# EAGLE board ProtoCard (EAGLE 9.6.1)
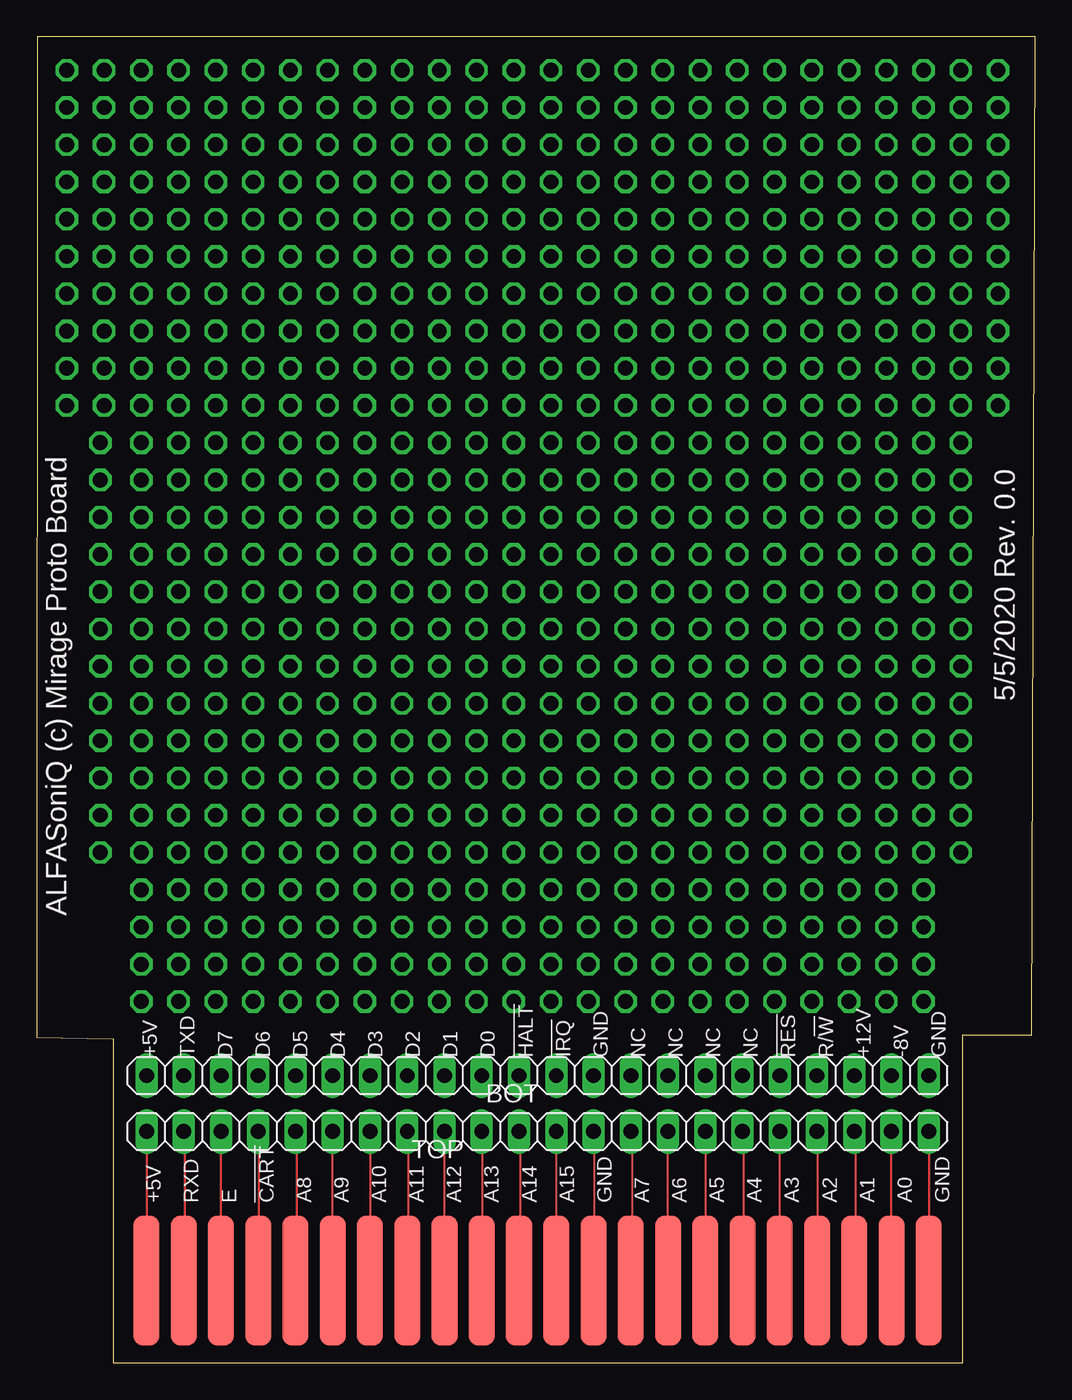
[diagram p0: board, top side]
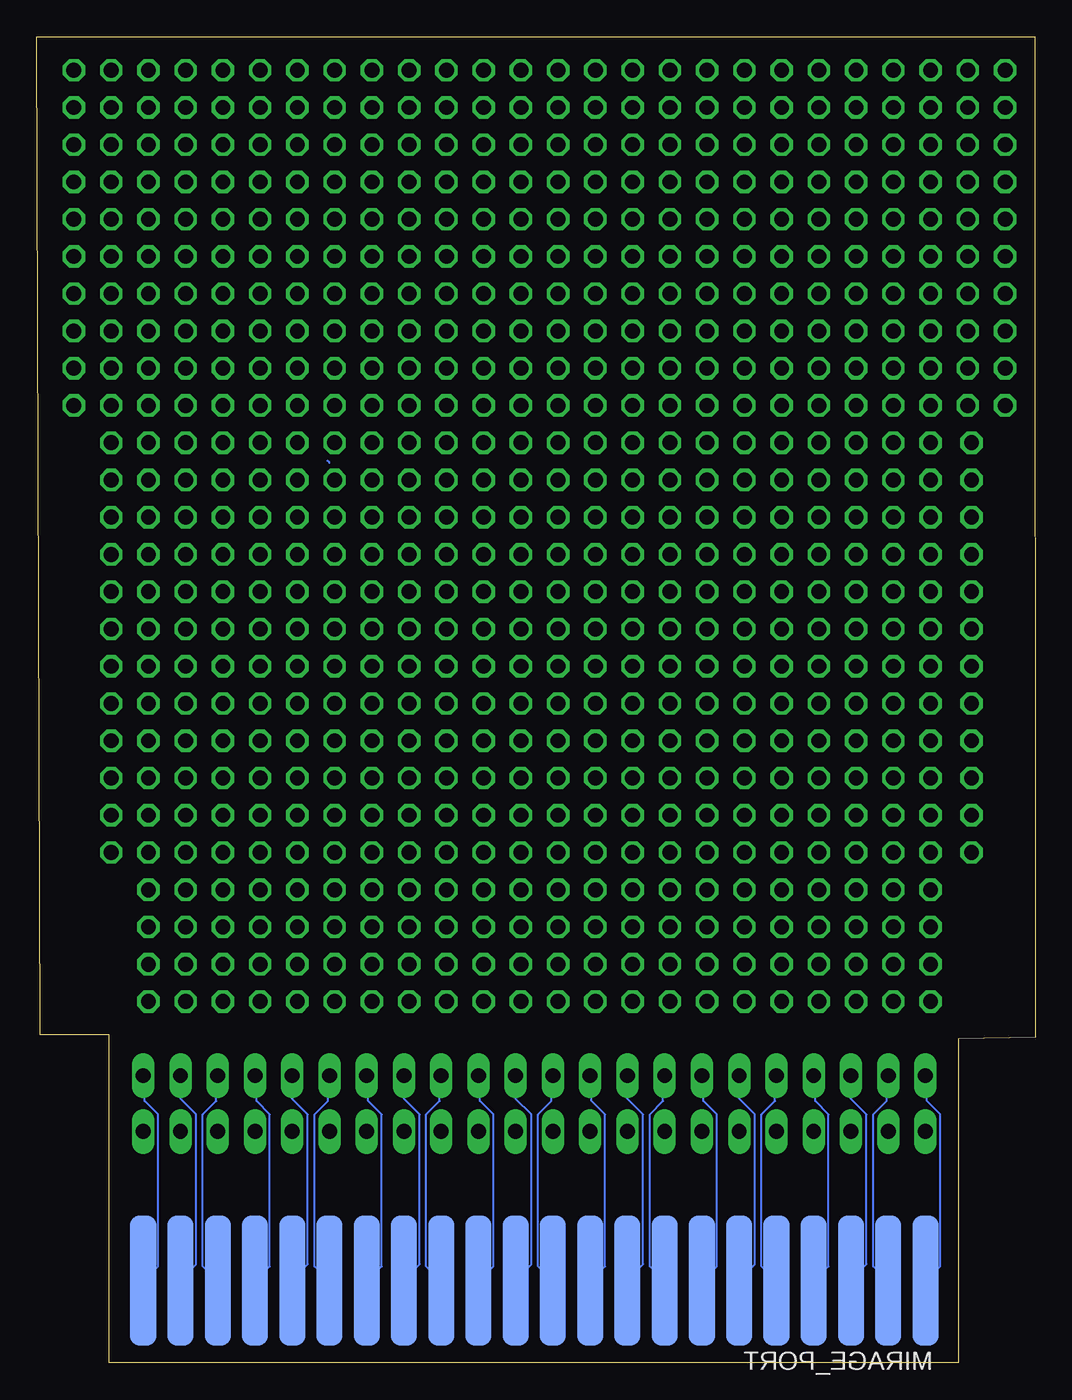
[diagram p1: board, bottom side, seen from below]

Size 68.1 x 90.42 mm. Coordinates in mm from the lower left corner, seen from the top.
Outline: 0.03,90.42 0,22.17 5.23,22.1 5.23,0 63.14,0 63.14,22.35 67.84,22.35 68.1,90.42 0.03,90.42
Copper layers (1*16): Top 0.035mm / dielectric 1.5mm / Bottom 0.035mm
Design rules "default": minimum track width 6mil, minimum drill 0.35mm, track to track 6mil, track to pad 6mil, pad to pad 6mil, via to via 6mil, smd to smd 6mil, copper to edge 40mil, drill to drill 6mil, minimum pad ring 10mil, minimum via ring 8mil, stop-mask expansion 4mil, vias tented up to drill 0mil, thermal gap 10mil

## Footprints (pad centres in the part's own frame; a part is rotated, then mirrored left to right if it is on the bottom)
1X22 = drill 1.016 long: 1 -26.67,0; 2 -24.13,0; 3 -21.59,0; 4 -19.05,0; 5 -16.51,0; 6 -13.97,0; 7 -11.43,0; 8 -8.89,0; 9 -6.35,0; 10 -3.81,0; 11 -1.27,0; 12 1.27,0; 13 3.81,0; 14 6.35,0; 15 8.89,0; 16 11.43,0; 17 13.97,0; 18 16.51,0; 19 19.05,0; 20 21.59,0; 21 24.13,0; 22 26.67,0
CARTRIDGE_EXPANSION-PORT = smd 1.778 x 8.89 bottom: 11 38.1,0; 13 35.56,0; 15 33.02,0; 17 30.48,0; !HALT 22.86,0; !IRQ 25.4,0; !RES 40.64,0; +5V_43 -2.54,0; +12 45.72,0; -8V 48.26,0; D0 20.32,0; D1 17.78,0; D2 15.24,0; D3 12.7,0; D4 10.16,0; D5 7.62,0; D6 5.08,0; D7 2.54,0; GND_1 50.8,0; GND_19 27.94,0; R/!W 43.18,0; TXD 0,0 | smd 1.778 x 8.89: !CART 5.08,0; +5V -2.54,0; A0 48.26,0; A1 45.72,0; A2 43.18,0; A3 40.64,0; A4 38.1,0; A5 35.56,0; A6 33.02,0; A7 30.48,0; A8 7.62,0; A9 10.16,0; A10 12.7,0; A11 15.24,0; A12 17.78,0; A13 20.32,0; A14 22.86,0; A15 25.4,0; E 2.54,0; GND 27.94,0; GND_2 50.8,0; RXD 0,0

## Placement (x,y rotation side)
BOT  BOT  [1X22]  34.16,19.58 180 top
MIRAGE_PORT  CARTRIDGE_EXPANSION-PORT  [CARTRIDGE_EXPANSION-PORT]  10.03,5.61 0 top
TOP  TOP  [1X22]  34.16,15.77 180 top

## Library data of the parts
BOT TOP = pinhead
MIRAGE_PORT = cart-proto

## Nets
!CART: MIRAGE_PORT.!CART TOP.19
!HALT: BOT.12 MIRAGE_PORT.!HALT
!IRQ: BOT.11 MIRAGE_PORT.!IRQ
!RES: BOT.5 MIRAGE_PORT.!RES
+5V_43: BOT.22 MIRAGE_PORT.+5V_43
+5V_44: MIRAGE_PORT.+5V TOP.22
+12: BOT.3 MIRAGE_PORT.+12
-8V: BOT.2 MIRAGE_PORT.-8V
A0: MIRAGE_PORT.A0 TOP.2
A1: MIRAGE_PORT.A1 TOP.3
A2: MIRAGE_PORT.A2 TOP.4
A3: MIRAGE_PORT.A3 TOP.5
A4: MIRAGE_PORT.A4 TOP.6
A5: MIRAGE_PORT.A5 TOP.7
A6: MIRAGE_PORT.A6 TOP.8
A7: MIRAGE_PORT.A7 TOP.9
A8: MIRAGE_PORT.A8 TOP.18
A9: MIRAGE_PORT.A9 TOP.17
A10: MIRAGE_PORT.A10 TOP.16
A11: MIRAGE_PORT.A11 TOP.15
A12: MIRAGE_PORT.A12 TOP.14
A13: MIRAGE_PORT.A13 TOP.13
A14: MIRAGE_PORT.A14 TOP.12
A15: MIRAGE_PORT.A15 TOP.11
D0: BOT.13 MIRAGE_PORT.D0
D1: BOT.14 MIRAGE_PORT.D1
D2: BOT.15 MIRAGE_PORT.D2
D3: BOT.16 MIRAGE_PORT.D3
D4: BOT.17 MIRAGE_PORT.D4
D5: BOT.18 MIRAGE_PORT.D5
D6: BOT.19 MIRAGE_PORT.D6
D7: BOT.20 MIRAGE_PORT.D7
E: MIRAGE_PORT.E TOP.20
GND: MIRAGE_PORT.GND TOP.10
GND_1: BOT.1 MIRAGE_PORT.GND_1
GND_2: MIRAGE_PORT.GND_2 TOP.1
GND_19: BOT.10 MIRAGE_PORT.GND_19
N$6: BOT.6 MIRAGE_PORT.11
N$7: BOT.7 MIRAGE_PORT.13
N$8: BOT.8 MIRAGE_PORT.15
N$9: BOT.9 MIRAGE_PORT.17
R/!W: BOT.4 MIRAGE_PORT.R/!W
RXD: MIRAGE_PORT.RXD TOP.21
TXD: BOT.21 MIRAGE_PORT.TXD

## Tracks (layer width: path | path; a pad name or v marks a point on that pad's centre or on a via)
5V  (via drill 1.02)
  other vias: 7.14,24.64
!CART
  Top 0.152: TOP.19 15.16,15.72 15.16,5.66 MIRAGE_PORT.!CART
!HALT
  Bottom 0.152: BOT.12 33,19.53 33,17.86 33.91,16.94 33.91,6.58 33,5.66 MIRAGE_PORT.!HALT
!IRQ
  Bottom 0.152: BOT.11 35.43,18.01 34.37,16.94 34.37,6.73 35.43,5.66 MIRAGE_PORT.!IRQ
!RES
  Bottom 0.152: BOT.5 50.67,18.01 49.61,16.94 49.61,6.73 50.67,5.66 MIRAGE_PORT.!RES
+5V
  Bottom 0.152: 48.13,61.37 48.29,61.52
+5V_43
  Bottom 0.152: BOT.22 7.39,19.53 7.39,17.86 6.48,16.94 6.48,6.58 7.39,5.66 MIRAGE_PORT.+5V_43
+5V_44
  Top 0.152: TOP.22 7.54,15.72 7.54,5.66 MIRAGE_PORT.+5V
+12
  Bottom 0.152: BOT.3 55.86,19.53 55.86,17.86 56.77,16.94 56.77,6.58 55.86,5.66 MIRAGE_PORT.+12
-8V
  Bottom 0.152: BOT.2 58.29,18.01 57.23,16.94 57.23,6.73 58.29,5.66 MIRAGE_PORT.-8V
A0
  Top 0.152: MIRAGE_PORT.A0 TOP.2
A1
  Top 0.152: TOP.3 55.86,15.72 55.86,5.66 MIRAGE_PORT.A1
A2
  Top 0.152: TOP.4 53.26,15.72 53.26,5.66 MIRAGE_PORT.A2
A3
  Top 0.152: MIRAGE_PORT.A3 TOP.5
A4
  Top 0.152: TOP.6 48.23,15.72 48.23,5.66 MIRAGE_PORT.A4
A5
  Top 0.152: TOP.7 45.64,15.72 45.64,5.66 MIRAGE_PORT.A5
A6
  Top 0.152: MIRAGE_PORT.A6 TOP.8
A7
  Top 0.152: TOP.9 40.62,15.72 40.62,5.66 MIRAGE_PORT.A7
A8
  Top 0.152: TOP.18 17.75,15.72 17.75,5.66 MIRAGE_PORT.A8
A9
  Top 0.152: MIRAGE_PORT.A9 TOP.17
A10
  Top 0.152: TOP.16 22.78,15.72 22.78,5.66 MIRAGE_PORT.A10
A11
  Top 0.152: TOP.15 25.38,15.72 25.38,5.66 MIRAGE_PORT.A11
A12
  Top 0.152: MIRAGE_PORT.A12 TOP.14
A13
  Top 0.152: TOP.13 30.4,15.72 30.4,5.66 MIRAGE_PORT.A13
A14
  Top 0.152: TOP.12 33,15.72 33,5.66 MIRAGE_PORT.A14
A15
  Top 0.152: MIRAGE_PORT.A15 TOP.11
D0
  Bottom 0.152: BOT.13 30.25,19.53 30.25,17.86 29.34,16.94 29.34,6.58 30.25,5.66 MIRAGE_PORT.D0
D1
  Bottom 0.152: BOT.14 27.81,18.01 26.75,16.94 26.75,6.73 27.81,5.66 MIRAGE_PORT.D1
D2
  Bottom 0.152: BOT.15 25.38,19.53 25.38,17.86 26.29,16.94 26.29,6.58 25.38,5.66 MIRAGE_PORT.D2
D3
  Bottom 0.152: BOT.16 22.63,19.53 22.63,17.86 21.72,16.94 21.72,6.58 22.63,5.66 MIRAGE_PORT.D3
D4
  Bottom 0.152: BOT.17 20.19,18.01 19.13,16.94 19.13,6.73 20.19,5.66 MIRAGE_PORT.D4
D5
  Bottom 0.152: BOT.18 17.75,19.53 17.75,17.86 18.67,16.94 18.67,6.58 17.75,5.66 MIRAGE_PORT.D5
D6
  Bottom 0.152: BOT.19 15.01,19.53 15.01,17.86 14.1,16.94 14.1,6.58 15.01,5.66 MIRAGE_PORT.D6
D7
  Bottom 0.152: BOT.20 12.57,18.01 11.51,16.94 11.51,6.73 12.57,5.66 MIRAGE_PORT.D7
E
  Top 0.152: MIRAGE_PORT.E TOP.20
GND
  Top 0.152: TOP.10 38.02,15.72 38.02,5.66 MIRAGE_PORT.GND
GND1  (via drill 1.02)
  other vias: 60.48,24.64
GND_1
  Bottom 0.152: BOT.1 60.73,19.53 60.73,17.86 59.82,16.94 59.82,6.58 60.73,5.66 MIRAGE_PORT.GND_1
GND_2
  Top 0.152: TOP.1 60.88,15.72 60.88,5.66 MIRAGE_PORT.GND_2
GND_19
  Bottom 0.152: BOT.10 37.87,19.53 37.87,17.86 36.96,16.94 36.96,6.58 37.87,5.66 MIRAGE_PORT.GND_19
N$1  (via drill 1.02)
  other vias: 47.78,27.18
N$2  (via drill 1.02)
  other vias: 9.68,32.26
N$3  (via drill 1.02)
  other vias: 9.68,34.8
N$4  (via drill 1.02)
  other vias: 9.68,37.34
N$5  (via drill 1.02)
  other vias: 9.68,39.88
N$6
  Bottom 0.152: BOT.6 48.23,19.53 48.23,17.86 49.15,16.94 49.15,6.58 48.23,5.66 MIRAGE_PORT.11
N$7
  Bottom 0.152: BOT.7 45.49,19.53 45.49,17.86 44.58,16.94 44.58,6.58 45.49,5.66 MIRAGE_PORT.13
N$8
  Bottom 0.152: BOT.8 43.05,18.01 41.99,16.94 41.99,6.73 43.05,5.66 MIRAGE_PORT.15
N$9
  Bottom 0.152: BOT.9 40.62,19.53 40.62,17.86 41.53,16.94 41.53,6.58 40.62,5.66 MIRAGE_PORT.17
N$10  (via drill 1.02)
  other vias: 9.68,42.42
N$11  (via drill 1.02)
  other vias: 9.68,44.96
N$12  (via drill 1.02)
  other vias: 9.68,47.5
N$13  (via drill 1.02)
  other vias: 9.68,50.04
N$14  (via drill 1.02)
  other vias: 9.68,52.58
N$15  (via drill 1.02)
  other vias: 9.68,55.12
N$16  (via drill 1.02)
  other vias: 9.68,57.66
N$17  (via drill 1.02)
  other vias: 9.68,60.2
N$18  (via drill 1.02)
  other vias: 9.68,62.74
N$19  (via drill 1.02)
  other vias: 9.68,65.28
N$20  (via drill 1.02)
  other vias: 9.68,67.82
N$21  (via drill 1.02)
  other vias: 32.54,47.5
N$22  (via drill 1.02)
  other vias: 30,47.5
N$23  (via drill 1.02)
  other vias: 55.4,24.64
N$24  (via drill 1.02)
  other vias: 32.54,44.96
N$25  (via drill 1.02)
  other vias: 57.94,27.18
N$26  (via drill 1.02)
  other vias: 52.86,24.64
N$27  (via drill 1.02)
  other vias: 57.94,29.72
N$28  (via drill 1.02)
  other vias: 55.4,27.18
N$29  (via drill 1.02)
  other vias: 50.32,24.64
N$30  (via drill 1.02)
  other vias: 55.4,29.72
N$31  (via drill 1.02)
  other vias: 52.86,27.18
N$32  (via drill 1.02)
  other vias: 52.86,29.72
N$33  (via drill 1.02)
  other vias: 50.32,27.18
N$34  (via drill 1.02)
  other vias: 50.32,29.72
N$35  (via drill 1.02)
  other vias: 47.78,29.72
N$36  (via drill 1.02)
  other vias: 47.78,24.64
N$37  (via drill 1.02)
  other vias: 45.24,27.18
N$38  (via drill 1.02)
  other vias: 45.24,29.72
N$39  (via drill 1.02)
  other vias: 45.24,24.64
N$40  (via drill 1.02)
  other vias: 42.7,27.18
N$41  (via drill 1.02)
  other vias: 42.7,29.72
N$42  (via drill 1.02)
  other vias: 42.7,24.64
N$43  (via drill 1.02)
  other vias: 40.16,27.18
N$44  (via drill 1.02)
  other vias: 40.16,29.72
N$45  (via drill 1.02)
  other vias: 40.16,24.64
N$46  (via drill 1.02)
  other vias: 37.62,27.18
N$47  (via drill 1.02)
  other vias: 37.62,29.72
N$48  (via drill 1.02)
  other vias: 37.62,24.64
N$49  (via drill 1.02)
  other vias: 35.08,27.18
N$50  (via drill 1.02)
  other vias: 35.08,29.72
N$51  (via drill 1.02)
  other vias: 35.08,24.64
N$52  (via drill 1.02)
  other vias: 32.54,27.18
N$53  (via drill 1.02)
  other vias: 32.54,29.72
N$54  (via drill 1.02)
  other vias: 32.54,24.64
N$55  (via drill 1.02)
  other vias: 30,27.18
N$56  (via drill 1.02)
  other vias: 30,29.72
N$57  (via drill 1.02)
  other vias: 30,24.64
N$58  (via drill 1.02)
  other vias: 27.46,27.18
N$59  (via drill 1.02)
  other vias: 27.46,29.72
N$60  (via drill 1.02)
  other vias: 27.46,24.64
N$61  (via drill 1.02)
  other vias: 24.92,27.18
N$62  (via drill 1.02)
  other vias: 24.92,29.72
N$63  (via drill 1.02)
  other vias: 24.92,24.64
N$64  (via drill 1.02)
  other vias: 22.38,27.18
N$65  (via drill 1.02)
  other vias: 22.38,29.72
N$66  (via drill 1.02)
  other vias: 22.38,24.64
N$67  (via drill 1.02)
  other vias: 19.84,27.18
N$68  (via drill 1.02)
  other vias: 19.84,29.72
N$69  (via drill 1.02)
  other vias: 19.84,24.64
N$70  (via drill 1.02)
  other vias: 17.3,27.18
N$71  (via drill 1.02)
  other vias: 17.3,29.72
N$72  (via drill 1.02)
  other vias: 17.3,24.64
N$73  (via drill 1.02)
  other vias: 14.76,27.18
N$74  (via drill 1.02)
  other vias: 14.76,29.72
N$75  (via drill 1.02)
  other vias: 14.76,24.64
N$76  (via drill 1.02)
  other vias: 12.22,27.18
N$77  (via drill 1.02)
  other vias: 12.22,29.72
N$78  (via drill 1.02)
  other vias: 12.22,24.64
N$79  (via drill 1.02)
  other vias: 9.68,27.18
N$80  (via drill 1.02)
  other vias: 9.68,29.72
N$81  (via drill 1.02)
  other vias: 9.68,24.64
N$82  (via drill 1.02)
  other vias: 35.08,47.5
N$83  (via drill 1.02)
  other vias: 9.68,70.36
N$84  (via drill 1.02)
  other vias: 9.68,72.9
N$85  (via drill 1.02)
  other vias: 57.94,32.26
N$86  (via drill 1.02)
  other vias: 55.4,32.26
N$87  (via drill 1.02)
  other vias: 52.86,32.26
N$88  (via drill 1.02)
  other vias: 50.32,32.26
N$89  (via drill 1.02)
  other vias: 47.78,32.26
N$90  (via drill 1.02)
  other vias: 45.24,32.26
N$91  (via drill 1.02)
  other vias: 42.7,32.26
N$92  (via drill 1.02)
  other vias: 40.16,32.26
N$93  (via drill 1.02)
  other vias: 37.62,32.26
N$94  (via drill 1.02)
  other vias: 35.08,32.26
N$95  (via drill 1.02)
  other vias: 32.54,32.26
N$96  (via drill 1.02)
  other vias: 30,32.26
N$97  (via drill 1.02)
  other vias: 27.46,32.26
N$98  (via drill 1.02)
  other vias: 24.92,32.26
N$99  (via drill 1.02)
  other vias: 22.38,32.26
N$100  (via drill 1.02)
  other vias: 19.84,32.26
N$101  (via drill 1.02)
  other vias: 17.3,32.26
N$102  (via drill 1.02)
  other vias: 14.76,32.26
N$103  (via drill 1.02)
  other vias: 12.22,32.26
N$104  (via drill 1.02)
  other vias: 7.14,70.36
N$105  (via drill 1.02)
  other vias: 7.14,67.82
N$106  (via drill 1.02)
  other vias: 57.94,34.8
N$107  (via drill 1.02)
  other vias: 55.4,34.8
N$108  (via drill 1.02)
  other vias: 52.86,34.8
N$109  (via drill 1.02)
  other vias: 50.32,34.8
N$110  (via drill 1.02)
  other vias: 47.78,34.8
N$111  (via drill 1.02)
  other vias: 45.24,34.8
N$112  (via drill 1.02)
  other vias: 42.7,34.8
N$113  (via drill 1.02)
  other vias: 40.16,34.8
N$114  (via drill 1.02)
  other vias: 37.62,34.8
N$115  (via drill 1.02)
  other vias: 35.08,34.8
N$116  (via drill 1.02)
  other vias: 32.54,34.8
N$117  (via drill 1.02)
  other vias: 30,34.8
N$118  (via drill 1.02)
  other vias: 27.46,34.8
N$119  (via drill 1.02)
  other vias: 24.92,34.8
N$120  (via drill 1.02)
  other vias: 22.38,34.8
N$121  (via drill 1.02)
  other vias: 19.84,34.8
N$122  (via drill 1.02)
  other vias: 17.3,34.8
N$123  (via drill 1.02)
  other vias: 14.76,34.8
N$124  (via drill 1.02)
  other vias: 12.22,34.8
N$125  (via drill 1.02)
  other vias: 7.14,65.28
N$126  (via drill 1.02)
  other vias: 7.14,62.74
N$127  (via drill 1.02)
  other vias: 57.94,37.34
N$128  (via drill 1.02)
  other vias: 55.4,37.34
N$129  (via drill 1.02)
  other vias: 52.86,37.34
N$130  (via drill 1.02)
  other vias: 50.32,37.34
N$131  (via drill 1.02)
  other vias: 47.78,37.34
N$132  (via drill 1.02)
  other vias: 45.24,37.34
N$133  (via drill 1.02)
  other vias: 42.7,37.34
N$134  (via drill 1.02)
  other vias: 40.16,37.34
N$135  (via drill 1.02)
  other vias: 37.62,37.34
N$136  (via drill 1.02)
  other vias: 35.08,37.34
N$137  (via drill 1.02)
  other vias: 32.54,37.34
N$138  (via drill 1.02)
  other vias: 30,37.34
N$139  (via drill 1.02)
  other vias: 27.46,37.34
N$140  (via drill 1.02)
  other vias: 24.92,37.34
N$141  (via drill 1.02)
  other vias: 22.38,37.34
N$142  (via drill 1.02)
  other vias: 19.84,37.34
N$143  (via drill 1.02)
  other vias: 17.3,37.34
N$144  (via drill 1.02)
  other vias: 14.76,37.34
N$145  (via drill 1.02)
  other vias: 12.22,37.34
N$146  (via drill 1.02)
  other vias: 7.14,27.18
N$147  (via drill 1.02)
  other vias: 7.14,29.72
N$148  (via drill 1.02)
  other vias: 57.94,39.88
N$149  (via drill 1.02)
  other vias: 55.4,39.88
N$150  (via drill 1.02)
  other vias: 52.86,39.88
N$151  (via drill 1.02)
  other vias: 50.32,39.88
N$152  (via drill 1.02)
  other vias: 47.78,39.88
N$153  (via drill 1.02)
  other vias: 45.24,39.88
N$154  (via drill 1.02)
  other vias: 42.7,39.88
N$155  (via drill 1.02)
  other vias: 40.16,39.88
N$156  (via drill 1.02)
  other vias: 37.62,39.88
N$157  (via drill 1.02)
  other vias: 35.08,39.88
N$158  (via drill 1.02)
  other vias: 32.54,39.88
N$159  (via drill 1.02)
  other vias: 30,39.88
N$160  (via drill 1.02)
  other vias: 27.46,39.88
N$161  (via drill 1.02)
  other vias: 24.92,39.88
N$162  (via drill 1.02)
  other vias: 22.38,39.88
N$163  (via drill 1.02)
  other vias: 19.84,39.88
N$164  (via drill 1.02)
  other vias: 17.3,39.88
N$165  (via drill 1.02)
  other vias: 14.76,39.88
N$166  (via drill 1.02)
  other vias: 12.22,39.88
N$167  (via drill 1.02)
  other vias: 7.14,32.26
N$168  (via drill 1.02)
  other vias: 7.14,34.8
N$169  (via drill 1.02)
  other vias: 57.94,42.42
N$170  (via drill 1.02)
  other vias: 55.4,42.42
N$171  (via drill 1.02)
  other vias: 52.86,42.42
N$172  (via drill 1.02)
  other vias: 50.32,42.42
N$173  (via drill 1.02)
  other vias: 47.78,42.42
N$174  (via drill 1.02)
  other vias: 45.24,42.42
N$175  (via drill 1.02)
  other vias: 42.7,42.42
N$176  (via drill 1.02)
  other vias: 40.16,42.42
N$177  (via drill 1.02)
  other vias: 37.62,42.42
N$178  (via drill 1.02)
  other vias: 30,42.42
N$179  (via drill 1.02)
  other vias: 27.46,42.42
N$180  (via drill 1.02)
  other vias: 24.92,42.42
N$181  (via drill 1.02)
  other vias: 22.38,42.42
N$182  (via drill 1.02)
  other vias: 19.84,42.42
N$183  (via drill 1.02)
  other vias: 17.3,42.42
N$184  (via drill 1.02)
  other vias: 14.76,42.42
N$185  (via drill 1.02)
  other vias: 12.22,42.42
N$186  (via drill 1.02)
  other vias: 7.14,37.34
N$187  (via drill 1.02)
  other vias: 7.14,39.88
N$188  (via drill 1.02)
  other vias: 60.48,44.96
N$189  (via drill 1.02)
  other vias: 55.4,44.96
N$190  (via drill 1.02)
  other vias: 52.86,44.96
N$191  (via drill 1.02)
  other vias: 50.32,44.96
N$192  (via drill 1.02)
  other vias: 47.78,44.96
N$193  (via drill 1.02)
  other vias: 45.24,44.96
N$194  (via drill 1.02)
  other vias: 42.7,44.96
N$195  (via drill 1.02)
  other vias: 40.16,44.96
N$196  (via drill 1.02)
  other vias: 37.62,44.96
N$197  (via drill 1.02)
  other vias: 30,44.96
N$198  (via drill 1.02)
  other vias: 27.46,44.96
N$199  (via drill 1.02)
  other vias: 24.92,44.96
N$200  (via drill 1.02)
  other vias: 22.38,44.96
N$201  (via drill 1.02)
  other vias: 19.84,44.96
N$202  (via drill 1.02)
  other vias: 17.3,44.96
N$203  (via drill 1.02)
  other vias: 14.76,44.96
N$204  (via drill 1.02)
  other vias: 12.22,44.96
N$205  (via drill 1.02)
  other vias: 7.14,42.42
N$206  (via drill 1.02)
  other vias: 7.14,44.96
N$207  (via drill 1.02)
  other vias: 57.94,47.5
N$208  (via drill 1.02)
  other vias: 55.4,47.5
N$209  (via drill 1.02)
  other vias: 52.86,47.5
N$210  (via drill 1.02)
  other vias: 50.32,47.5
N$211  (via drill 1.02)
  other vias: 47.78,47.5
N$212  (via drill 1.02)
  other vias: 45.24,47.5
N$213  (via drill 1.02)
  other vias: 42.7,47.5
N$214  (via drill 1.02)
  other vias: 40.16,47.5
N$215  (via drill 1.02)
  other vias: 37.62,47.5
N$216  (via drill 1.02)
  other vias: 7.14,47.5
N$217  (via drill 1.02)
  other vias: 7.14,50.04
N$218  (via drill 1.02)
  other vias: 35.08,44.96
N$219  (via drill 1.02)
  other vias: 27.46,47.5
N$220  (via drill 1.02)
  other vias: 24.92,47.5
N$221  (via drill 1.02)
  other vias: 22.38,47.5
N$222  (via drill 1.02)
  other vias: 19.84,47.5
N$223  (via drill 1.02)
  other vias: 17.3,47.5
N$224  (via drill 1.02)
  other vias: 14.76,47.5
N$225  (via drill 1.02)
  other vias: 12.22,47.5
N$226  (via drill 1.02)
  other vias: 7.14,52.58
N$227  (via drill 1.02)
  other vias: 7.14,55.12
N$228  (via drill 1.02)
  other vias: 57.94,50.04
N$229  (via drill 1.02)
  other vias: 55.4,50.04
N$230  (via drill 1.02)
  other vias: 52.86,50.04
N$231  (via drill 1.02)
  other vias: 50.32,50.04
N$232  (via drill 1.02)
  other vias: 47.78,50.04
N$233  (via drill 1.02)
  other vias: 45.24,50.04
N$234  (via drill 1.02)
  other vias: 42.7,50.04
N$235  (via drill 1.02)
  other vias: 40.16,50.04
N$236  (via drill 1.02)
  other vias: 37.62,50.04
N$237  (via drill 1.02)
  other vias: 35.08,50.04
N$238  (via drill 1.02)
  other vias: 32.54,50.04
N$239  (via drill 1.02)
  other vias: 30,50.04
N$240  (via drill 1.02)
  other vias: 27.46,50.04
N$241  (via drill 1.02)
  other vias: 24.92,50.04
N$242  (via drill 1.02)
  other vias: 22.38,50.04
N$243  (via drill 1.02)
  other vias: 19.84,50.04
N$244  (via drill 1.02)
  other vias: 17.3,50.04
N$245  (via drill 1.02)
  other vias: 14.76,50.04
N$246  (via drill 1.02)
  other vias: 12.22,50.04
N$247  (via drill 1.02)
  other vias: 7.14,57.66
N$248  (via drill 1.02)
  other vias: 7.14,60.2
N$249  (via drill 1.02)
  other vias: 57.94,52.58
N$250  (via drill 1.02)
  other vias: 55.4,52.58
N$251  (via drill 1.02)
  other vias: 52.86,52.58
N$252  (via drill 1.02)
  other vias: 50.32,52.58
N$253  (via drill 1.02)
  other vias: 47.78,52.58
N$254  (via drill 1.02)
  other vias: 45.24,52.58
N$255  (via drill 1.02)
  other vias: 42.7,52.58
N$256  (via drill 1.02)
  other vias: 40.16,52.58
N$257  (via drill 1.02)
  other vias: 37.62,52.58
N$258  (via drill 1.02)
  other vias: 35.08,52.58
N$259  (via drill 1.02)
  other vias: 32.54,52.58
N$260  (via drill 1.02)
  other vias: 30,52.58
N$261  (via drill 1.02)
  other vias: 27.46,52.58
N$262  (via drill 1.02)
  other vias: 24.92,52.58
N$263  (via drill 1.02)
  other vias: 22.38,52.58
N$264  (via drill 1.02)
  other vias: 19.84,52.58
N$265  (via drill 1.02)
  other vias: 17.3,52.58
N$266  (via drill 1.02)
  other vias: 14.76,52.58
N$267  (via drill 1.02)
  other vias: 12.22,52.58
N$268  (via drill 1.02)
  other vias: 60.48,80.52
N$269  (via drill 1.02)
  other vias: 60.48,77.98
N$270  (via drill 1.02)
  other vias: 57.94,55.12
N$271  (via drill 1.02)
  other vias: 55.4,55.12
N$272  (via drill 1.02)
  other vias: 52.86,55.12
N$273  (via drill 1.02)
  other vias: 50.32,55.12
N$274  (via drill 1.02)
  other vias: 47.78,55.12
N$275  (via drill 1.02)
  other vias: 45.24,55.12
N$276  (via drill 1.02)
  other vias: 42.7,55.12
N$277  (via drill 1.02)
  other vias: 40.16,55.12
N$278  (via drill 1.02)
  other vias: 37.62,55.12
N$279  (via drill 1.02)
  other vias: 35.08,55.12
N$280  (via drill 1.02)
  other vias: 32.54,55.12
N$281  (via drill 1.02)
  other vias: 30,55.12
N$282  (via drill 1.02)
  other vias: 27.46,55.12
N$283  (via drill 1.02)
  other vias: 24.92,55.12
N$284  (via drill 1.02)
  other vias: 22.38,55.12
N$285  (via drill 1.02)
  other vias: 19.84,55.12
N$286  (via drill 1.02)
  other vias: 17.3,55.12
N$287  (via drill 1.02)
  other vias: 14.76,55.12
N$288  (via drill 1.02)
  other vias: 12.22,55.12
N$289  (via drill 1.02)
  other vias: 60.48,75.44
N$290  (via drill 1.02)
  other vias: 60.48,72.9
N$291  (via drill 1.02)
  other vias: 57.94,57.66
N$292  (via drill 1.02)
  other vias: 55.4,57.66
N$293  (via drill 1.02)
  other vias: 52.86,57.66
N$294  (via drill 1.02)
  other vias: 50.32,57.66
N$295  (via drill 1.02)
  other vias: 47.78,57.66
N$296  (via drill 1.02)
  other vias: 45.24,57.66
N$297  (via drill 1.02)
  other vias: 42.7,57.66
N$298  (via drill 1.02)
  other vias: 40.16,57.66
N$299  (via drill 1.02)
  other vias: 37.62,57.66
N$300  (via drill 1.02)
  other vias: 35.08,57.66
N$301  (via drill 1.02)
  other vias: 32.54,57.66
N$302  (via drill 1.02)
  other vias: 30,57.66
N$303  (via drill 1.02)
  other vias: 27.46,57.66
N$304  (via drill 1.02)
  other vias: 24.92,57.66
N$305  (via drill 1.02)
  other vias: 22.38,57.66
N$306  (via drill 1.02)
  other vias: 19.84,57.66
N$307  (via drill 1.02)
  other vias: 17.3,57.66
N$308  (via drill 1.02)
  other vias: 14.76,57.66
N$309  (via drill 1.02)
  other vias: 12.22,57.66
N$310  (via drill 1.02)
  other vias: 60.48,70.36
N$311  (via drill 1.02)
  other vias: 60.48,67.82
N$312  (via drill 1.02)
  other vias: 57.94,60.2
N$313  (via drill 1.02)
  other vias: 55.4,60.2
N$314  (via drill 1.02)
  other vias: 52.86,60.2
N$315  (via drill 1.02)
  other vias: 50.32,60.2
N$316  (via drill 1.02)
  other vias: 47.78,60.2
N$317  (via drill 1.02)
  other vias: 45.24,60.2
N$318  (via drill 1.02)
  other vias: 42.7,60.2
N$319  (via drill 1.02)
  other vias: 40.16,60.2
N$320  (via drill 1.02)
  other vias: 37.62,60.2
N$321  (via drill 1.02)
  other vias: 35.08,60.2
N$322  (via drill 1.02)
  other vias: 32.54,60.2
N$323  (via drill 1.02)
  other vias: 30,60.2
N$324  (via drill 1.02)
  other vias: 27.46,60.2
N$325  (via drill 1.02)
  other vias: 24.92,60.2
N$326  (via drill 1.02)
  other vias: 22.38,60.2
N$327  (via drill 1.02)
  other vias: 19.84,60.2
N$328  (via drill 1.02)
  other vias: 17.3,60.2
N$329  (via drill 1.02)
  other vias: 14.76,60.2
N$330  (via drill 1.02)
  other vias: 12.22,60.2
N$331  (via drill 1.02)
  other vias: 60.48,65.28
N$332  (via drill 1.02)
  other vias: 60.48,62.74
N$333  (via drill 1.02)
  other vias: 57.94,62.74
N$334  (via drill 1.02)
  other vias: 55.4,62.74
N$335  (via drill 1.02)
  other vias: 52.86,62.74
N$336  (via drill 1.02)
  other vias: 50.32,62.74
N$337  (via drill 1.02)
  other vias: 47.78,62.74
N$338  (via drill 1.02)
  other vias: 45.24,62.74
N$339  (via drill 1.02)
  other vias: 42.7,62.74
N$340  (via drill 1.02)
  other vias: 40.16,62.74
N$341  (via drill 1.02)
  other vias: 37.62,62.74
N$342  (via drill 1.02)
  other vias: 35.08,62.74
N$343  (via drill 1.02)
  other vias: 32.54,62.74
N$344  (via drill 1.02)
  other vias: 30,62.74
N$345  (via drill 1.02)
  other vias: 27.46,62.74
N$346  (via drill 1.02)
  other vias: 24.92,62.74
N$347  (via drill 1.02)
  other vias: 22.38,62.74
N$348  (via drill 1.02)
  other vias: 19.84,62.74
N$349  (via drill 1.02)
  other vias: 17.3,62.74
N$350  (via drill 1.02)
  other vias: 14.76,62.74
N$351  (via drill 1.02)
  other vias: 12.22,62.74
N$352  (via drill 1.02)
  other vias: 60.48,60.2
N$353  (via drill 1.02)
  other vias: 60.48,57.66
N$354  (via drill 1.02)
  other vias: 57.94,65.28
N$355  (via drill 1.02)
  other vias: 55.4,65.28
N$356  (via drill 1.02)
  other vias: 52.86,65.28
N$357  (via drill 1.02)
  other vias: 50.32,65.28
N$358  (via drill 1.02)
  other vias: 47.78,65.28
N$359  (via drill 1.02)
  other vias: 45.24,65.28
N$360  (via drill 1.02)
  other vias: 42.7,65.28
N$361  (via drill 1.02)
  other vias: 40.16,65.28
N$362  (via drill 1.02)
  other vias: 37.62,65.28
N$363  (via drill 1.02)
  other vias: 35.08,65.28
N$364  (via drill 1.02)
  other vias: 32.54,65.28
N$365  (via drill 1.02)
  other vias: 30,65.28
N$366  (via drill 1.02)
  other vias: 27.46,65.28
N$367  (via drill 1.02)
  other vias: 24.92,65.28
N$368  (via drill 1.02)
  other vias: 22.38,65.28
N$369  (via drill 1.02)
  other vias: 19.84,65.28
N$370  (via drill 1.02)
  other vias: 17.3,65.28
N$371  (via drill 1.02)
  other vias: 14.76,65.28
N$372  (via drill 1.02)
  other vias: 12.22,65.28
N$373  (via drill 1.02)
  other vias: 60.48,55.12
N$374  (via drill 1.02)
  other vias: 60.48,52.58
N$375  (via drill 1.02)
  other vias: 57.94,67.82
N$376  (via drill 1.02)
  other vias: 55.4,67.82
N$377  (via drill 1.02)
  other vias: 52.86,67.82
N$378  (via drill 1.02)
  other vias: 50.32,67.82
N$379  (via drill 1.02)
  other vias: 47.78,67.82
N$380  (via drill 1.02)
  other vias: 45.24,67.82
N$381  (via drill 1.02)
  other vias: 42.7,67.82
N$382  (via drill 1.02)
  other vias: 40.16,67.82
N$383  (via drill 1.02)
  other vias: 37.62,67.82
N$384  (via drill 1.02)
  other vias: 35.08,67.82
N$385  (via drill 1.02)
  other vias: 32.54,67.82
N$386  (via drill 1.02)
  other vias: 30,67.82
N$387  (via drill 1.02)
  other vias: 27.46,67.82
N$388  (via drill 1.02)
  other vias: 24.92,67.82
N$389  (via drill 1.02)
  other vias: 22.38,67.82
N$390  (via drill 1.02)
  other vias: 19.84,67.82
N$391  (via drill 1.02)
  other vias: 17.3,67.82
N$392  (via drill 1.02)
  other vias: 14.76,67.82
N$393  (via drill 1.02)
  other vias: 12.22,67.82
N$394  (via drill 1.02)
  other vias: 60.48,50.04
N$395  (via drill 1.02)
  other vias: 60.48,47.5
N$396  (via drill 1.02)
  other vias: 57.94,70.36
N$397  (via drill 1.02)
  other vias: 55.4,70.36
N$398  (via drill 1.02)
  other vias: 52.86,70.36
N$399  (via drill 1.02)
  other vias: 50.32,70.36
N$400  (via drill 1.02)
  other vias: 47.78,70.36
N$401  (via drill 1.02)
  other vias: 45.24,70.36
N$402  (via drill 1.02)
  other vias: 42.7,70.36
N$403  (via drill 1.02)
  other vias: 40.16,70.36
N$404  (via drill 1.02)
  other vias: 37.62,70.36
N$405  (via drill 1.02)
  other vias: 35.08,70.36
N$406  (via drill 1.02)
  other vias: 32.54,70.36
N$407  (via drill 1.02)
  other vias: 30,70.36
N$408  (via drill 1.02)
  other vias: 27.46,70.36
N$409  (via drill 1.02)
  other vias: 24.92,70.36
N$410  (via drill 1.02)
  other vias: 22.38,70.36
N$411  (via drill 1.02)
  other vias: 19.84,70.36
N$412  (via drill 1.02)
  other vias: 17.3,70.36
N$413  (via drill 1.02)
  other vias: 14.76,70.36
N$414  (via drill 1.02)
  other vias: 12.22,70.36
N$415  (via drill 1.02)
  other vias: 57.94,44.96
N$416  (via drill 1.02)
  other vias: 60.48,42.42
N$417  (via drill 1.02)
  other vias: 57.94,72.9
N$418  (via drill 1.02)
  other vias: 55.4,72.9
N$419  (via drill 1.02)
  other vias: 52.86,72.9
N$420  (via drill 1.02)
  other vias: 50.32,72.9
N$421  (via drill 1.02)
  other vias: 47.78,72.9
N$422  (via drill 1.02)
  other vias: 45.24,72.9
N$423  (via drill 1.02)
  other vias: 42.7,72.9
N$424  (via drill 1.02)
  other vias: 40.16,72.9
N$425  (via drill 1.02)
  other vias: 37.62,72.9
N$426  (via drill 1.02)
  other vias: 35.08,72.9
N$427  (via drill 1.02)
  other vias: 32.54,72.9
N$428  (via drill 1.02)
  other vias: 30,72.9
N$429  (via drill 1.02)
  other vias: 27.46,72.9
N$430  (via drill 1.02)
  other vias: 24.92,72.9
N$431  (via drill 1.02)
  other vias: 22.38,72.9
N$432  (via drill 1.02)
  other vias: 19.84,72.9
N$433  (via drill 1.02)
  other vias: 17.3,72.9
N$434  (via drill 1.02)
  other vias: 14.76,72.9
N$435  (via drill 1.02)
  other vias: 12.22,72.9
N$436  (via drill 1.02)
  other vias: 60.48,39.88
N$437  (via drill 1.02)
  other vias: 7.14,80.52
N$438  (via drill 1.02)
  other vias: 60.48,37.34
N$439  (via drill 1.02)
  other vias: 57.94,80.52
N$440  (via drill 1.02)
  other vias: 55.4,80.52
N$441  (via drill 1.02)
  other vias: 52.86,80.52
N$442  (via drill 1.02)
  other vias: 50.32,80.52
N$443  (via drill 1.02)
  other vias: 47.78,80.52
N$444  (via drill 1.02)
  other vias: 45.24,80.52
N$445  (via drill 1.02)
  other vias: 42.7,80.52
N$446  (via drill 1.02)
  other vias: 40.16,80.52
N$447  (via drill 1.02)
  other vias: 37.62,80.52
N$448  (via drill 1.02)
  other vias: 35.08,80.52
N$449  (via drill 1.02)
  other vias: 32.54,80.52
N$450  (via drill 1.02)
  other vias: 30,80.52
N$451  (via drill 1.02)
  other vias: 27.46,80.52
N$452  (via drill 1.02)
  other vias: 24.92,80.52
N$453  (via drill 1.02)
  other vias: 22.38,80.52
N$454  (via drill 1.02)
  other vias: 19.84,80.52
N$455  (via drill 1.02)
  other vias: 17.3,80.52
N$456  (via drill 1.02)
  other vias: 14.76,80.52
N$457  (via drill 1.02)
  other vias: 12.22,80.52
N$458  (via drill 1.02)
  other vias: 60.48,34.8
N$459  (via drill 1.02)
  other vias: 9.68,80.52
N$460  (via drill 1.02)
  other vias: 60.48,32.26
N$461  (via drill 1.02)
  other vias: 57.94,75.44
N$462  (via drill 1.02)
  other vias: 55.4,75.44
N$463  (via drill 1.02)
  other vias: 52.86,75.44
N$464  (via drill 1.02)
  other vias: 50.32,75.44
N$465  (via drill 1.02)
  other vias: 47.78,75.44
N$466  (via drill 1.02)
  other vias: 45.24,75.44
N$467  (via drill 1.02)
  other vias: 42.7,75.44
N$468  (via drill 1.02)
  other vias: 40.16,75.44
N$469  (via drill 1.02)
  other vias: 37.62,75.44
N$470  (via drill 1.02)
  other vias: 35.08,75.44
N$471  (via drill 1.02)
  other vias: 32.54,75.44
N$472  (via drill 1.02)
  other vias: 30,75.44
N$473  (via drill 1.02)
  other vias: 27.46,75.44
N$474  (via drill 1.02)
  other vias: 24.92,75.44
N$475  (via drill 1.02)
  other vias: 22.38,75.44
N$476  (via drill 1.02)
  other vias: 19.84,75.44
N$477  (via drill 1.02)
  other vias: 17.3,75.44
N$478  (via drill 1.02)
  other vias: 14.76,75.44
N$479  (via drill 1.02)
  other vias: 12.22,75.44
N$480  (via drill 1.02)
  other vias: 60.48,29.72
N$481  (via drill 1.02)
  other vias: 60.48,27.18
N$482  (via drill 1.02)
  other vias: 7.14,72.9
N$483  (via drill 1.02)
  other vias: 9.68,75.44
N$484  (via drill 1.02)
  other vias: 57.94,77.98
N$485  (via drill 1.02)
  other vias: 55.4,77.98
N$486  (via drill 1.02)
  other vias: 52.86,77.98
N$487  (via drill 1.02)
  other vias: 50.32,77.98
N$488  (via drill 1.02)
  other vias: 47.78,77.98
N$489  (via drill 1.02)
  other vias: 45.24,77.98
N$490  (via drill 1.02)
  other vias: 42.7,77.98
N$491  (via drill 1.02)
  other vias: 40.16,77.98
N$492  (via drill 1.02)
  other vias: 37.62,77.98
N$493  (via drill 1.02)
  other vias: 35.08,77.98
N$494  (via drill 1.02)
  other vias: 32.54,77.98
N$495  (via drill 1.02)
  other vias: 30,77.98
N$496  (via drill 1.02)
  other vias: 27.46,77.98
N$497  (via drill 1.02)
  other vias: 24.92,77.98
N$498  (via drill 1.02)
  other vias: 22.38,77.98
N$499  (via drill 1.02)
  other vias: 19.84,77.98
N$500  (via drill 1.02)
  other vias: 17.3,77.98
N$501  (via drill 1.02)
  other vias: 57.94,24.64
N$502  (via drill 1.02)
  other vias: 35.08,42.42
N$503  (via drill 1.02)
  other vias: 32.54,42.42
N$504  (via drill 1.02)
  other vias: 14.76,77.98
N$505  (via drill 1.02)
  other vias: 12.22,77.98
N$506  (via drill 1.02)
  other vias: 9.68,77.98
N$507  (via drill 1.02)
  other vias: 7.14,75.44
N$508  (via drill 1.02)
  other vias: 7.14,77.98
N$509  (via drill 1.02)
  other vias: 60.48,88.14
N$510  (via drill 1.02)
  other vias: 60.48,85.6
N$511  (via drill 1.02)
  other vias: 60.48,83.06
N$512  (via drill 1.02)
  other vias: 57.94,88.14
N$513  (via drill 1.02)
  other vias: 55.4,88.14
N$514  (via drill 1.02)
  other vias: 52.86,88.14
N$515  (via drill 1.02)
  other vias: 50.32,88.14
N$516  (via drill 1.02)
  other vias: 47.78,88.14
N$517  (via drill 1.02)
  other vias: 45.24,88.14
N$518  (via drill 1.02)
  other vias: 42.7,88.14
N$519  (via drill 1.02)
  other vias: 40.16,88.14
N$520  (via drill 1.02)
  other vias: 37.62,88.14
N$521  (via drill 1.02)
  other vias: 35.08,88.14
N$522  (via drill 1.02)
  other vias: 32.54,88.14
N$523  (via drill 1.02)
  other vias: 30,88.14
N$524  (via drill 1.02)
  other vias: 27.46,88.14
N$525  (via drill 1.02)
  other vias: 24.92,88.14
N$526  (via drill 1.02)
  other vias: 22.38,88.14
N$527  (via drill 1.02)
  other vias: 19.84,88.14
N$528  (via drill 1.02)
  other vias: 17.3,88.14
N$529  (via drill 1.02)
  other vias: 14.76,88.14
N$530  (via drill 1.02)
  other vias: 12.22,88.14
N$531  (via drill 1.02)
  other vias: 7.14,88.14
N$532  (via drill 1.02)
  other vias: 9.68,88.14
N$533  (via drill 1.02)
  other vias: 57.94,83.06
N$534  (via drill 1.02)
  other vias: 55.4,83.06
N$535  (via drill 1.02)
  other vias: 52.86,83.06
N$536  (via drill 1.02)
  other vias: 50.32,83.06
N$537  (via drill 1.02)
  other vias: 47.78,83.06
N$538  (via drill 1.02)
  other vias: 45.24,83.06
N$539  (via drill 1.02)
  other vias: 42.7,83.06
N$540  (via drill 1.02)
  other vias: 40.16,83.06
N$541  (via drill 1.02)
  other vias: 37.62,83.06
N$542  (via drill 1.02)
  other vias: 35.08,83.06
N$543  (via drill 1.02)
  other vias: 32.54,83.06
N$544  (via drill 1.02)
  other vias: 30,83.06
N$545  (via drill 1.02)
  other vias: 27.46,83.06
N$546  (via drill 1.02)
  other vias: 24.92,83.06
N$547  (via drill 1.02)
  other vias: 22.38,83.06
N$548  (via drill 1.02)
  other vias: 19.84,83.06
N$549  (via drill 1.02)
  other vias: 17.3,83.06
N$550  (via drill 1.02)
  other vias: 14.76,83.06
N$551  (via drill 1.02)
  other vias: 12.22,83.06
N$552  (via drill 1.02)
  other vias: 9.68,83.06
N$553  (via drill 1.02)
  other vias: 57.94,85.6
N$554  (via drill 1.02)
  other vias: 55.4,85.6
N$555  (via drill 1.02)
  other vias: 52.86,85.6
N$556  (via drill 1.02)
  other vias: 50.32,85.6
N$557  (via drill 1.02)
  other vias: 47.78,85.6
N$558  (via drill 1.02)
  other vias: 45.24,85.6
N$559  (via drill 1.02)
  other vias: 42.7,85.6
N$560  (via drill 1.02)
  other vias: 40.16,85.6
N$561  (via drill 1.02)
  other vias: 37.62,85.6
N$562  (via drill 1.02)
  other vias: 35.08,85.6
N$563  (via drill 1.02)
  other vias: 32.54,85.6
N$564  (via drill 1.02)
  other vias: 30,85.6
N$565  (via drill 1.02)
  other vias: 27.46,85.6
N$566  (via drill 1.02)
  other vias: 24.92,85.6
N$567  (via drill 1.02)
  other vias: 22.38,85.6
N$568  (via drill 1.02)
  other vias: 19.84,85.6
N$569  (via drill 1.02)
  other vias: 17.3,85.6
N$570  (via drill 1.02)
  other vias: 14.76,85.6
N$571  (via drill 1.02)
  other vias: 12.22,85.6
N$572  (via drill 1.02)
  other vias: 9.68,85.6
N$573  (via drill 1.02)
  other vias: 7.14,83.06
N$574  (via drill 1.02)
  other vias: 7.14,85.6
N$575  (via drill 1.02)
  other vias: 4.6,65.28
N$576  (via drill 1.02)
  other vias: 2.06,65.28
N$577  (via drill 1.02)
  other vias: 4.6,67.82
N$578  (via drill 1.02)
  other vias: 2.06,67.82
N$579  (via drill 1.02)
  other vias: 4.6,70.36
N$580  (via drill 1.02)
  other vias: 2.06,70.36
N$581  (via drill 1.02)
  other vias: 4.6,72.9
N$582  (via drill 1.02)
  other vias: 2.06,80.52
N$583  (via drill 1.02)
  other vias: 4.6,80.52
N$584  (via drill 1.02)
  other vias: 2.06,72.9
N$585  (via drill 1.02)
  other vias: 4.6,75.44
N$586  (via drill 1.02)
  other vias: 4.6,77.98
N$587  (via drill 1.02)
  other vias: 2.06,75.44
N$588  (via drill 1.02)
  other vias: 2.06,77.98
N$589  (via drill 1.02)
  other vias: 2.06,88.14
N$590  (via drill 1.02)
  other vias: 4.6,88.14
N$591  (via drill 1.02)
  other vias: 4.6,83.06
N$592  (via drill 1.02)
  other vias: 4.6,85.6
N$593  (via drill 1.02)
  other vias: 2.06,83.06
N$594  (via drill 1.02)
  other vias: 2.06,85.6
N$595  (via drill 1.02)
  other vias: 65.56,65.28
N$596  (via drill 1.02)
  other vias: 63.02,65.28
N$597  (via drill 1.02)
  other vias: 65.56,67.82
N$598  (via drill 1.02)
  other vias: 63.02,67.82
N$599  (via drill 1.02)
  other vias: 65.56,70.36
N$600  (via drill 1.02)
  other vias: 63.02,70.36
N$601  (via drill 1.02)
  other vias: 65.56,72.9
N$602  (via drill 1.02)
  other vias: 63.02,80.52
N$603  (via drill 1.02)
  other vias: 65.56,80.52
N$604  (via drill 1.02)
  other vias: 63.02,72.9
N$605  (via drill 1.02)
  other vias: 65.56,75.44
N$606  (via drill 1.02)
  other vias: 65.56,77.98
N$607  (via drill 1.02)
  other vias: 63.02,75.44
N$608  (via drill 1.02)
  other vias: 63.02,77.98
N$609  (via drill 1.02)
  other vias: 63.02,88.14
N$610  (via drill 1.02)
  other vias: 65.56,88.14
N$611  (via drill 1.02)
  other vias: 65.56,83.06
N$612  (via drill 1.02)
  other vias: 65.56,85.6
N$613  (via drill 1.02)
  other vias: 63.02,83.06
N$614  (via drill 1.02)
  other vias: 63.02,85.6
N$615  (via drill 1.02)
  other vias: 4.34,34.8
N$616  (via drill 1.02)
  other vias: 4.34,37.34
N$617  (via drill 1.02)
  other vias: 4.34,39.88
N$618  (via drill 1.02)
  other vias: 4.34,42.42
N$619  (via drill 1.02)
  other vias: 4.34,44.96
N$620  (via drill 1.02)
  other vias: 4.34,47.5
N$621  (via drill 1.02)
  other vias: 4.34,50.04
N$622  (via drill 1.02)
  other vias: 4.34,52.58
N$623  (via drill 1.02)
  other vias: 4.34,55.12
N$624  (via drill 1.02)
  other vias: 4.34,57.66
N$625  (via drill 1.02)
  other vias: 4.34,60.2
N$626  (via drill 1.02)
  other vias: 4.34,62.74
N$627  (via drill 1.02)
  other vias: 63.02,34.8
N$628  (via drill 1.02)
  other vias: 63.02,37.34
N$629  (via drill 1.02)
  other vias: 63.02,39.88
N$630  (via drill 1.02)
  other vias: 63.02,42.42
N$631  (via drill 1.02)
  other vias: 63.02,44.96
N$632  (via drill 1.02)
  other vias: 63.02,47.5
N$633  (via drill 1.02)
  other vias: 63.02,50.04
N$634  (via drill 1.02)
  other vias: 63.02,52.58
N$679  (via drill 1.02)
  other vias: 63.02,55.12
N$680  (via drill 1.02)
  other vias: 63.02,57.66
N$681  (via drill 1.02)
  other vias: 63.02,60.2
N$682  (via drill 1.02)
  other vias: 63.02,62.74
R/!W
  Bottom 0.152: BOT.4 53.11,19.53 53.11,17.86 52.2,16.94 52.2,6.58 53.11,5.66 MIRAGE_PORT.R/!W
RXD
  Top 0.152: TOP.21 10.14,15.72 10.14,5.66 MIRAGE_PORT.RXD
TXD
  Bottom 0.152: BOT.21 10.14,19.53 10.14,17.86 11.05,16.94 11.05,6.58 10.14,5.66 MIRAGE_PORT.TXD

## Text on the board
tPlace: 5/5/2020 Rev. 0.0 | ALFASoniQ (c) Mirage Proto Board
tNames: +5V / TXD / D7 / D6 / D5 / D4 / D3 / D2 / D1 / D0 / !HALT / !IRQ / GND / NC / NC / NC / NC / !RES / R/!W / +12V / -8V / GND | +5V / RXD / E / !CART / A8 / A9 / A10 / A11 / A12 / A13 / A14 / A15 / GND / A7 / A6 / A5 / A4 / A3 / A2 / A1 / A0 / GND